# Altium PCB PCB1.PcbDoc
Units mm, origin at the board's own origin, x right, y up, seen from the top; angles counter-clockwise.
Board outline 34 x 34 mm, 2 copper layers (Top Layer, Bottom Layer); 51 components, 29 nets, 142 pads, 73 vias.
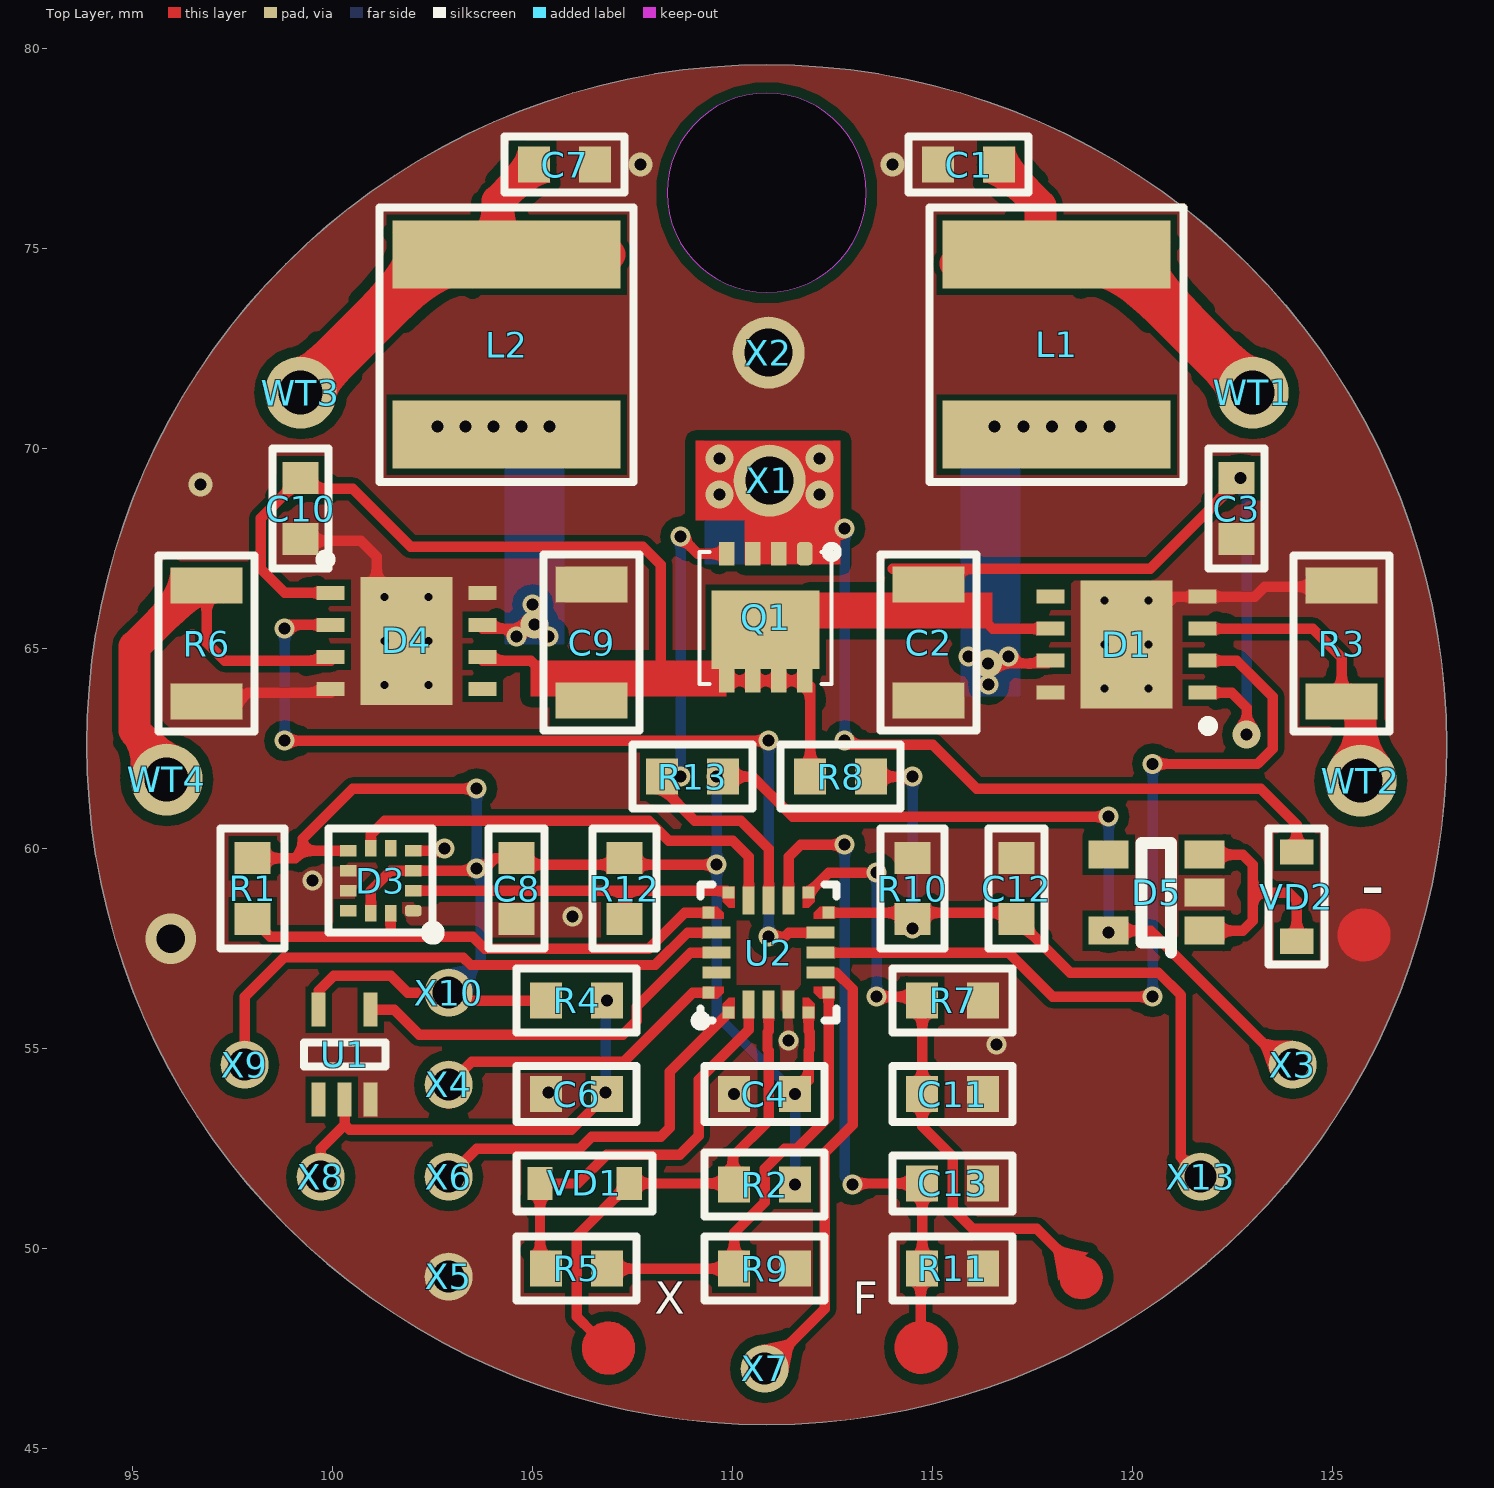
[diagram p0: Top Layer view]
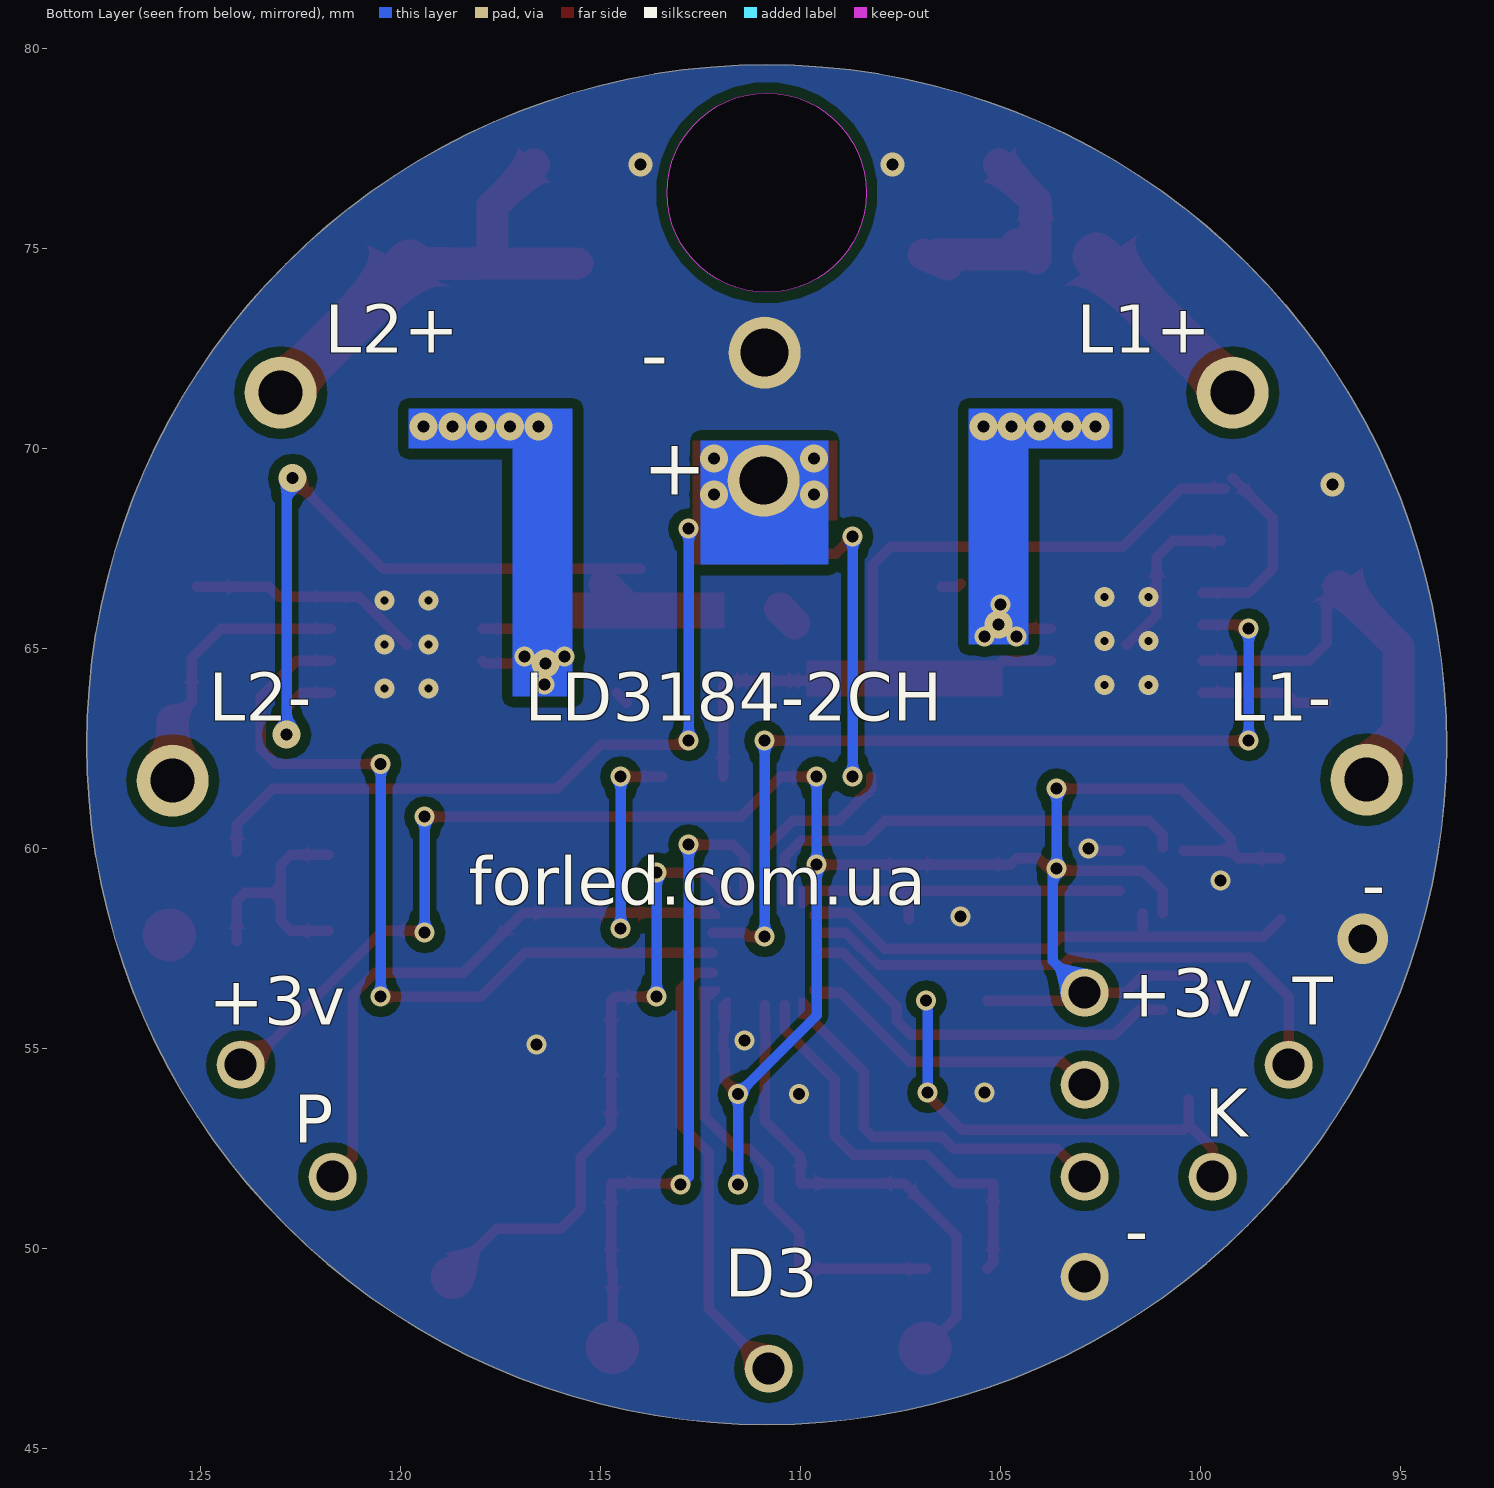
[diagram p1: Bottom Layer view, seen from below]
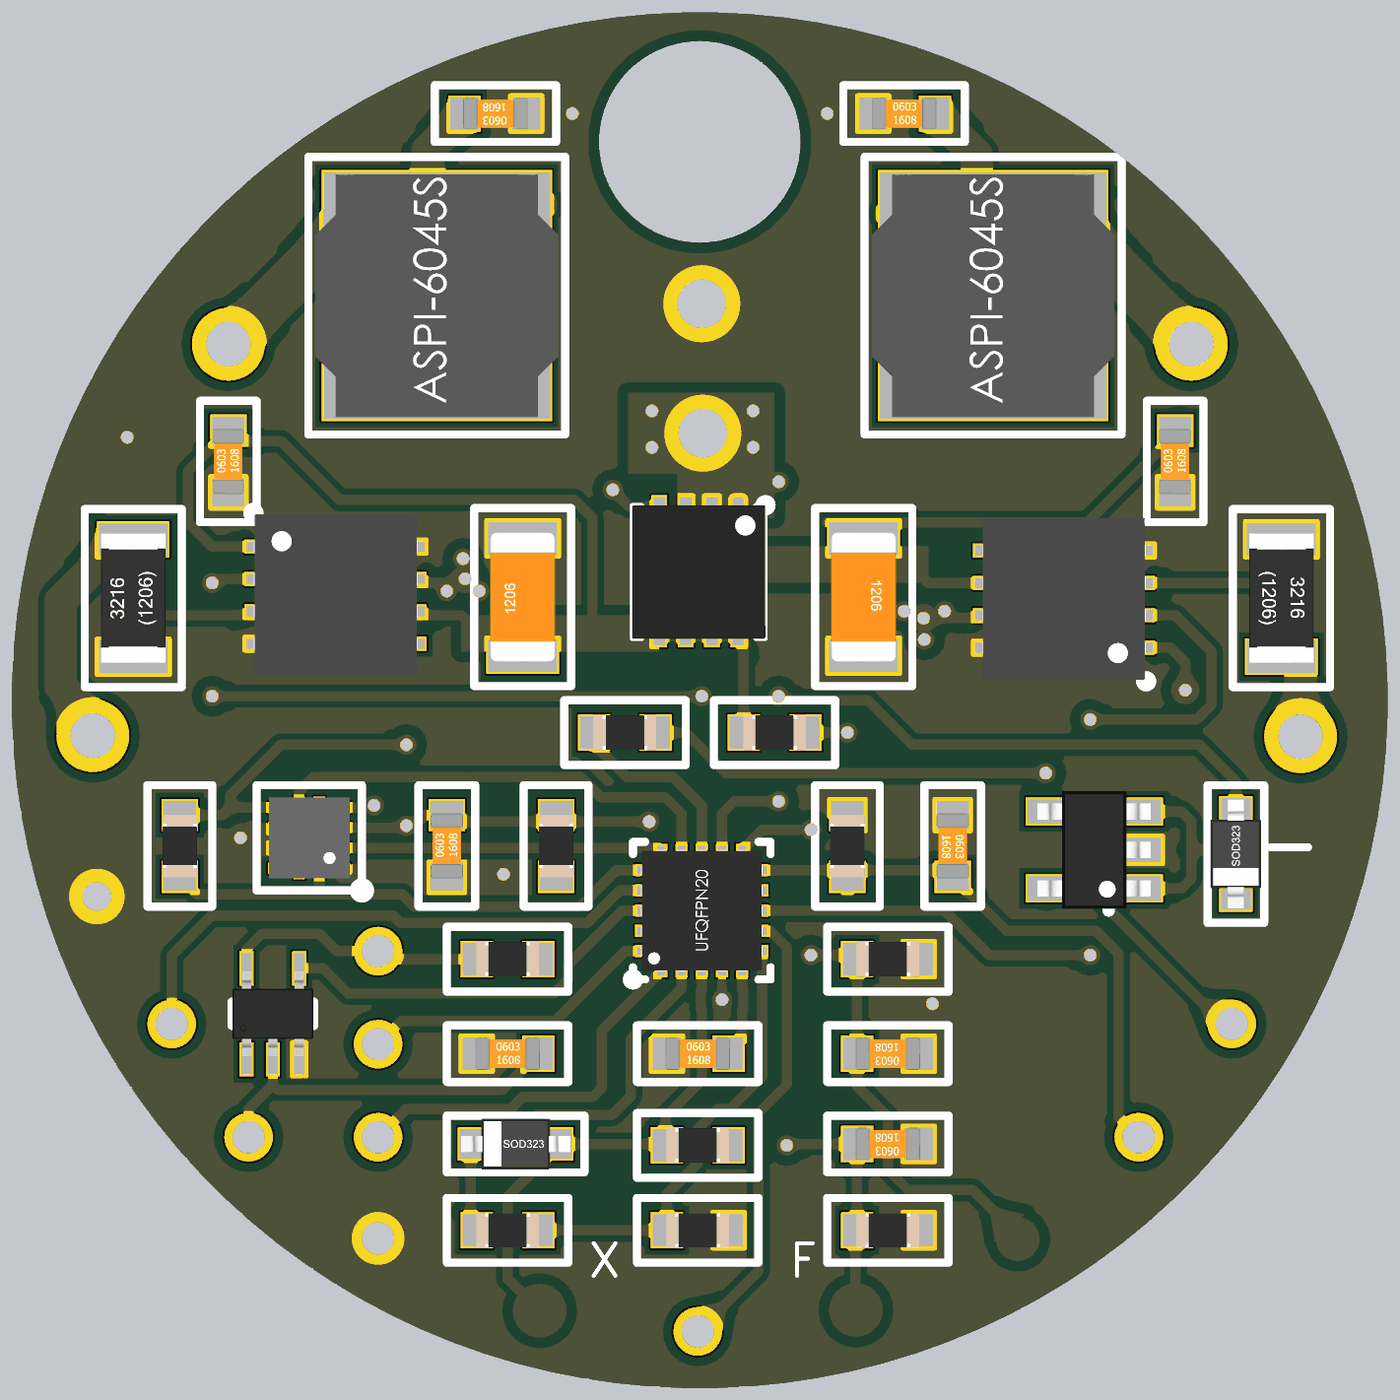
[diagram p2: 3D render of the assembled board from above, using the file's embedded part models]

## Layer stack, top to bottom
Top Solder: solder mask 0.0102, Solder Resist, Dk 3.5
Top Layer: signal copper 0.0356
Dielectric 1: dielectric 0.32, FR-4, Dk 4.8
Bottom Layer: signal copper 0.0356
Bottom Solder: solder mask 0.0102, Solder Resist, Dk 3.5

## Board outline
93.85,62.6 ccw(c110.85,62.6) 110.85,45.6 ccw(c110.85,62.6) 127.85,62.6 ccw(c110.85,62.6) 110.85,79.6 ccw(c110.85,62.6)
cut-out: 108.359,76.4 ccw(c110.85,76.4) 110.85,73.909 ccw(c110.85,76.4) 113.341,76.4 ccw(c110.85,76.4) 110.85,78.891 ccw(c110.85,76.4)

## Design rules (kind name [scope] priority, off if disabled: settings)
Clearance [All] p1: gap=0.254 except(0.01: Arc-SMDPad Track-SMDPad SMDPad-SMDPad; 0.15: Track-Track Track-THPad Track-Via Track-Fill Track-Poly Track-Region Track-Text SMDPad-THPad SMDPad-Via SMDPad-Fill SMDPad-Poly SMDPad-Region SMDPad-Text)
PasteMaskExpansion [All] p1: expansion=-0.051
PlaneConnect [All] p1: planeconnectstyle=Direct reliefexpansion=0.508 reliefentries=4 reliefconductorwidth=0.254 reliefairgap=0.254
PolygonConnect [All] p1: connectstyle=Direct reliefconductorwidth=0.254 reliefentries=4 polygonreliefangle="90 Angle" airgapwidth=0.254
RoutingVias [All] p1: holewidth=0.711 width=1.27 viastyle="Through Hole" minholewidth=0.711 minwidth=1.27 maxholewidth=0.711 maxwidth=1.27
SolderMaskExpansion [All] p1: expansion=0.051
Width [All] p1: maxlimit=1.27 minlimit=0.127 preferedwidth=0.254
28 further rules are at their usual default settings.

## Components (designator, comment, footprint, x,y, rotation, side; value= is the part's Value field where it differs from the comment)
C1 "10u" "Cap 0603" 115.9,77.1 r0 top
C2 "22u" "Cap 1206" 114.9,65.15 r270 top
C3 "1n0" "Cap 0603" 122.6,68.5 r90 top
C4 "1n0" "Cap 0603" 110.8,53.867 r0 top
C6 "10p" "Cap 0603" 106.1,53.867 r0 top
C7 "10u" "Cap 0603" 105.8,77.1 r180 top
C8 "10p" "Cap 0603" 104.6,59 r90 top
C9 "22u" "Cap 1206" 106.475,65.15 r90 top
C10 "1n0" "Cap 0603" 99.2,68.5 r90 top
C11 "1n6" "Cap 0603" 115.5,53.867 r180 top
C12 "1n6" "Cap 0603" 117.1,59 r270 top
C13 "1n6" "Cap 0603" 115.5,51.633 r180 top
D1 "LED2001" "VQFPN-8 4x4" 119.85,65.1 r90 top
D3 "BMA253" "LGA-12 2x2x0.9" 101.2,59.2 r180 top
D4 "LED2001" "VQFPN-8 4x4" 101.85,65.197 r270 top
D5 "AP2125K-3.3TRG1" SOT23-5 120.6,58.9 r270 top
L1 "51" ASPI-6045S-5R1N-T 118.1,72.6 r90 top
L2 "51" ASPI-6045S-5R1N-T 104.35,72.6 r90 top
Q1 "IRLHM620" "PQFN-8 3.3x3.3" 110.825,65.77 r180 top
R1 "103" "R0603 5%" 98,59 r270 top
R2 "103" "R0603 5%" 110.8,51.6 r0 top
R3 "PAD" "Resistor 1206" 125.225,65.125 r270 top
R4 "102" "R0603 5%" 106.1,56.2 r180 top
R5 "103" "R0603 5%" 106.1,49.5 r0 top
R6 "PAD" "Resistor 1206" 96.85,65.125 r90 top
R7 "104" "R0603 5%" 115.5,56.2 r180 top
R8 "654" "R0603 5%" 112.7,61.8 r180 top
R9 "103" "R0603 5%" 110.8,49.5 r180 top
R10 "104" "R0603 5%" 114.5,59 r270 top
R11 "104" "R0603 5%" 115.5,49.5 r180 top
R12 "203" "R0603 5%" 107.3,59 r270 top
R13 "104" "R0603 5%" 109,61.8 r0 top
U1 "SN74AUP" SC-70-5 100.3,54.85 r90 top
U2 "STM8L101" "UFQFPN20 3x3x0.5" 110.9,57.4 r90 top
VD1 "JV" SOD323 106.3,51.633 r0 top
VD2 "JV" SOD323 124.1,58.8 r90 top
WT1 "*" WT 123,71.4 r270 top
WT2 "*" WT 125.7,61.7 r270 top
WT3 "*" WT 99.2,71.4 r90 top
WT4 "*" WT 95.85,61.725 r90 top
X1 "*" "TP 0.8mm"#1 110.925,69.2 r0 top
X2 "*" "TP 0.8mm"#1 110.9,72.4 r180 top
X3 "*" "TP 0.8mm"#2 124,54.6 r180 top
X4 "*" "TP 0.8mm"#2 102.9,54.1 r180 top
X5 "*" "TP 0.8mm"#2 102.9,49.3 r180 top
X6 "*" "TP 0.8mm"#2 102.9,51.8 r180 top
X7 "*" "TP 0.8mm"#2 110.8,47 r270 top
X8 "*" "TP 0.8mm"#2 99.7,51.8 r0 top
X9 "*" "TP 0.8mm"#2 97.8,54.6 r180 top
X10 "*" "TP 0.8mm"#2 102.9,56.4 r270 top
X13 "*" "TP 0.8mm"#2 121.7,51.8 r90 top

## Footprints (in the part's own frame and the unit in brackets; to place one, negate y for a bottom-side part, rotate by r counter-clockwise, add the part's x,y. Pads: shape width x height; smd on the part's side, far side on the other; paste and mask are expansions set on the pad)
ASPI-6045S-5R1N-T [mm]
  rect 1.7x5.7 smd: 1(-2.25,0) 2(2.25,0)
  silkscreen extent -3.43,-3.17 3.43,3.18, body extent -3,-3 3,3, height 4.5
"Cap 0603" [mm]
  rect 0.8x0.9 smd: 1(-0.762,0) 2(0.762,0)
  silkscreen extent -1.5,-0.7 1.5,0.7, body extent -0.8,-0.4 0.8,0.4, height 0.8
"Cap 1206" [mm]
  rect 0.9x1.8 smd: 1(-1.45,0) 2(1.45,0)
  silkscreen extent -2.2,-1.2 2.2,1.2, body extent -1.6,-0.8 1.6,0.8, height 1
"LGA-12 2x2x0.9" [mm] "LGA-12 2x2x0.9"
  rrect50% 0.41x0.28 smd: 1(-0.815,0.75)
  rect 0.41x0.28 smd: 2(-0.815,0.25) 3(-0.815,-0.25) 4(-0.815,-0.75) 7(0.815,-0.75) 8(0.815,-0.25) 9(0.815,0.25) 10(0.815,0.75)
  rect 0.28x0.41 smd: 5(-0.25,-0.815) 6(0.25,-0.815) 11(0.25,0.815) 12(-0.25,0.815)
  silkscreen extent -1.45,-1.3 1.3,1.45, body extent -1,-1 1,1, height 0.95
"PQFN-8 3.3x3.3" [mm]
  rrect50% 0.39x0.58 smd: 1(-0.975,-1.605)
  rect 0.39x0.58 smd: 2(-0.325,-1.605) 3(0.325,-1.605) 4(0.975,-1.605) 5(-0.975,1.57) 5(-0.325,1.57) 5(0.325,1.57) 5(0.975,1.57)
  rect 2.7x1.96 smd paste-2: 5(0,0.3)
  silkscreen extent -1.8,-1.8 1.65,1.65, body extent -1.65,-1.65 1.65,1.65, height 0.76
"R0603 5%" [mm]
  rect 0.8x0.9 smd: 1(-0.762,0) 2(0.762,0)
  silkscreen extent -1.5,-0.8 1.5,0.8, body extent -0.77,-0.43 0.78,0.43, height 0.43
"Resistor 1206" [mm]
  rect 0.9x1.8 smd: 1(-1.45,0) 2(1.45,0)
  silkscreen extent -2.2,-1.2 2.2,1.2, body extent -1.6,-0.8 1.6,0.8, height 0.55
SC-70-5 [mm]
  rect 0.85x0.35 smd: 1(-1.125,0.65) 2(-1.125,0) 3(-1.125,-0.65) 4(1.125,-0.65) 5(1.125,0.65)
  silkscreen extent -0.3,-1.02 0.3,1.02, body extent -1.05,-1 1.05,1, height 0.95
SOD323 [mm]
  rect 0.63x0.83 smd: 1(-1.115,0) 2(1.115,0)
  silkscreen extent -1.7,-0.7 1.7,0.7, body extent -1.35,-0.62 1.35,0.63, height 1.1
SOT23-5 [mm]
  rect 0.7x1 smd: 1(0.95,1.2) 2(0,1.2) 3(-0.95,1.2) 4(-0.95,-1.2) 5(0.95,-1.2)
  silkscreen extent -1.24,-0.38 1.5,0.36, body extent -1.45,-1.4 1.45,1.4, height 1.45
"TP 0.8mm"#1 [mm]
  round 1.8 hole 1.2: 1(0,0)
"TP 0.8mm"#2 [mm]
  round 1.2 hole 0.8: 1(0,0)
"UFQFPN20 3x3x0.5" [mm]
  rect 0.3x0.3 smd paste-0.3 mask-0.3: 1(-1.5,1) 5(-1.5,-1) 6(-1,-1.5) 10(1,-1.5) 11(1.5,-1) 15(1.5,1) 16(1,1.5) 20(-1,1.5)
  rect 0.7x0.3 smd: 2(-1.3,0.5) 3(-1.3,0) 4(-1.3,-0.5) 12(1.3,-0.5) 13(1.3,0) 14(1.3,0.5)
  rect 0.3x0.7 smd: 7(-0.5,-1.3) 8(0,-1.3) 9(0.5,-1.3) 17(0.5,1.3) 18(0,1.3) 19(-0.5,1.3)
  Top Layer region: -1.15,1.65 -0.85,1.65 -0.85,1.125 -1,1.125 -1.15,1.275
  Top Layer region: -1.65,1.15 -1.65,0.85 -1.125,0.85 -1.125,1 -1.275,1.15
  Top Layer region: -1.15,-1.65 -0.85,-1.65 -0.85,-1.125 -1,-1.125 -1.15,-1.275
  Top Layer region: -1.65,-1.15 -1.65,-0.85 -1.125,-0.85 -1.125,-1 -1.275,-1.15
  Top Layer region: 1.65,-1.15 1.65,-0.85 1.125,-0.85 1.125,-1 1.275,-1.15
  Top Layer region: 1.15,-1.65 0.85,-1.65 0.85,-1.125 1,-1.125 1.15,-1.275
  Top Layer region: 1.15,1.65 0.85,1.65 0.85,1.125 1,1.125 1.15,1.275
  Top Layer region: 1.65,1.15 1.65,0.85 1.125,0.85 1.125,1 1.275,1.15
  silkscreen extent -1.82,-1.7 1.7,1.82, body extent -1.5,-1.5 1.5,1.5, height 0.55
"VQFPN-8 4x4" [mm]
  rect 0.35x0.7 smd: 1(-1.2,-1.9) 2(-0.4,-1.9) 3(0.4,-1.9) 4(1.2,-1.9) 5(1.2,1.9) 6(0.4,1.9) 7(-0.4,1.9) 8(-1.2,1.9)
  rect 3.2x2.3 smd: 9(0,0)
  silkscreen extent -2.16,-2.16 -1.91,-1.91, body extent -2,-2.02 2,2.02, height 0.9
WT [mm]
  round 1.8 hole 1.1: 1(0,0)

## Part data
C1 C7: library part CMP-00038-7, "NO"
C2 C9: library part CMP-00564-4, "NO"
C3 C4 C10: library part CMP-00074-6, "1n x 50V"
C6 C8: library part CMP-00036-6, "10p x 25V"
C11 C12 C13: library part CMP-00078-6, "1n6 x 50V"
D1 D4: library part CMP-00546-6
D3: library part CMP-00712-2
D5: library part CMP-00704-3
L1 L2: library part CMP-00554-3, "ASPI-6045S-5R1N-T, 5.1uH x 3.3A"
Q1: library part CMP-00792-2, "IRLHM620PbF"
R1 R2 R5 R9: library part CMP-00052-5, "R 10K"
R3 R6: library part CMP-00516-5
R4: library part CMP-00040-5, "R 1K0"
R7 R10 R11 R13: library part CMP-00156-5, "R M10"
R8: library part CMP-00565-4, "R M65"
R12: library part CMP-00056-5, "R 20K"
U1: library part SN74AUP1G17DCKR, "SN74AUP1G17DCKR"
U2: library part CMP-03099-1, "STM8L101F3U6TR"
VD1 VD2: library part CMP-00083-4, "BAT54HT1G"
WT1 WT2 WT3 WT4: library part CMP-00159-3, "WT"
X1 X2 X3 X4 X5 X6 X7 X8 X9 X10 X13: library part CMP-00326-5, "TP 0.8mm"

## Via types
v1: diameter 0.5, hole 0.3, Top Layer to Bottom Layer, tented both sides, 39 vias
v2: diameter 0.7, hole 0.3, Top Layer to Bottom Layer, tented both sides, 18 vias
v3: diameter 0.5, hole 0.2, Top Layer to Bottom Layer, 12 vias
v4: diameter 0.6, hole 0.3, Top Layer to Bottom Layer, tented both sides, 3 vias
v5: diameter 1.27, hole 0.711, Top Layer to Bottom Layer, 1 vias

## Nets (pads, with @x,y where several pads share a name; then routed paths per layer and width w, separated by ;. In a path a pad name is that pad's centre, name@x,y a point inside that pad or via, vN(x,y) a via of type N, cw(c..) or ccw(c..) an arc to the next point about the centre after c; other vN are vias at no path point)
20V_IN: Q1.1 Q1.2 Q1.3 VD2.2 X1.1 | length 20.5
  Top Layer w0.254: 110.9,67.475 110.8,67.375 Q1.2 Q1.1 112.175,67.375 v1(112.8,68) ; v1@112.8,62.8 113,62.6 115,62.6 116.1,61.5 123.2,61.5 124.1,60.6 VD2.2
  Bottom Layer w0.254: v1@112.8,62.8 v1(112.8,68)
  other v1: 112.8,62.7
  other v2: 109.669,68.85 112.169,68.85 109.669,69.75 112.169,69.75
+3: C4.2 C8.2 D3.3 D3.7 D3.11 D5.5 R1.1 R2.2 R4.2 R12.1 R13.2 U1.5 U2.5 X3.1 X10.1 | length 61.3
  Top Layer w0.254: R1.1 99.062,59.762 99.25,59.95 ; U1.5 99.65,56.45 100.025,56.825 101.45,56.825 101.875,56.4 X10.1 103.1,56.2 R4.2 ; D3.7@100.424,59.95 D3.7 99.25,59.95 ; D3.11 100.95,58.95 101.2,59.2 ; 101.174,59.2 101.2,59.2 ; v1(103.6,61.5) 100.5,61.5 99.25,60.25 99.25,59.95 ; v1(109.6,59.6) 104.762,59.6 C8.2 104.062,59.762 103.75,59.45 D3.3 101.45,59.45 101.2,59.2 ; R13.2 110.5,61.8 111.5,60.8 v1(119.4,60.8) ; v1(111.562,53.867) 111.9,54.205 111.9,54.955 111.927,54.982 111.927,55.418 111.9,55.445 U2.5 ; D5.5 120.45,57.95 X3.1@123.8,54.6
  Bottom Layer w0.254: X10.1 103.7,57.2 v1@103.7,59.5 ; v1(103.6,59.5) v1(103.6,61.5) ; v1(109.6,61.8) v1(109.6,59.6) 109.6,55.829 v1(111.562,53.867) v1(111.562,51.6) ; v1(119.4,57.9) v1(119.4,60.8)
ADC_ON: R5.1 U2.2 VD1.1 | length 10.4
  Top Layer w0.254: R5.1 105.185,49.653 VD1.1 106.133,51.633 106.85,52.35 108.675,52.35 109.15,52.825 109.15,54.225 110.4,55.475 U2.2
ADC_SET: R5.2 R9.2 U2.6 | length 11.2
  Top Layer w0.254: R5.2 R9.2 110.038,50.4 110.8,51.162 110.8,52 111.3,52.5 111.6,52.5 112.4,53.3 U2.6
AXEL_INT: D3.6 U2.14 | length 11.4
  Top Layer w0.254: D3.6 100.95,60.35 101.3,60.7 107.9,60.7 108.4,60.2 110,60.2 110.4,59.8 U2.14
BAT_MEASURE: C12.2 R8.1 R10.2 U2.10 X13.1 | length 19.2
  Top Layer w0.254: U2.10 116.938,58.4 C12.2 118.438,56.9 120.645,56.9 121.2,56.345 121.2,52.3 X13.1 ; R8.1 v1(114.5,61.8)
  Bottom Layer w0.254: v1(114.5,58) v1(114.5,61.8)
BTN_protect: U1.4 U2.18 | length 10
  Top Layer w0.254: U1.4 101.539,55.975 102.164,55.35 107.25,55.35 107.6,55.7 107.6,56.057 108.943,57.4 U2.18
D3: U2.7 X7.1 | length 11.4
  Top Layer w0.254: X7.1 112.3,48.5 112.3,52.4 113,53.1 113,56.492 112.592,56.9 U2.7
DIM_1: D1.2 U2.8 | length 21.3
  Top Layer w0.254: U2.8 116.9,57.4 118,56.3 v1(120.5,56.3) ; v1@120.4,62.122 v1(120.5,62.122) 123.122,62.122 123.5,62.5 123.5,63.8 122.6,64.7 D1.2
  Bottom Layer w0.254: v1(120.5,56.3) v1(120.5,62.122)
DIM_2: D4.2 U2.9 | length 22.2
  Top Layer w0.254: v1(98.8,62.7) v1(110.9,62.7) ; v1(98.8,65.5) 98.897,65.597 D4.2 ; v1(110.9,57.8) 111.3,57.8 111.4,57.9 U2.9
  Bottom Layer w0.254: v1(98.8,62.7) v1(98.8,65.5) ; v1@110.9,57.9 v1(110.9,62.7)
DQ: U2.17 X9.1 | length 14.3
  Top Layer w0.254: X9.1 97.8,56.3 98.777,57.277 103.263,57.277 103.444,57.096 108.067,57.096 108.871,57.9 U2.17
DRIVERS_POWON: Q1.4 R13.1 U2.13 | length 12.2
  Top Layer w0.254: R13.1 108.238,61.512 109.05,60.7 110.2,60.7 110.9,60 U2.13 ; v1(108.7,67.8) 109.125,67.375 Q1.4
  Bottom Layer w0.254: v1(108.7,61.8) v1(108.7,67.8)
DRIVERS_VCC: C2.1 C3.2 C9.1 C10.2 D1.1 D1.6 D4.1 D4.6 Q1.5 R8.2 | length 43.8
  Top Layer w0.254: C10.2 98.2,68.262 98.2,67 98.803,66.397 D4.1 ; C10.2@99.4,69 100.5,69 101.95,67.55 107.75,67.55 108.2,67.1 108.2,64.6 ; D4.6@103.75,64.7 104.95,64.7 105.075,64.575 ; Q1.5@109.85,64.2 110.5,64.2 111.15,64.2 111.8,64.2 111.938,64.062 R8.2 ; C2.1@114,67 120.438,67 v2(122.7,69.262) ; 116.25,65.75 116.5,65.5 D1.6 ; D1.1 122.475,63.9 122.85,63.525 v2(122.85,62.85)
  Top Layer w0.8: Q1.5@110.15,65.63 110.408,65.887 Q1.5@110.52,66 ; 114.3,66 C2.1
  Bottom Layer w0.254: v2(122.7,69.262) 122.85,69.112 v2(122.85,62.85)
LED1: C1.2 L1.2 WT1.1 | length 12.1
  Top Layer w0.8: L1.2@115.575,74.625 L1.2@117.7,74.625 ; C1.2 117.7,76.062 L1.2@117.7,74.708 ; L1.2@117.65,74.715 L1.2@117.7,74.708 ; L1.2@118.1,74.65 118.072,74.654 L1.2@117.7,74.708 ; L1.2@119.775,74.625 L1.2@117.7,74.625 ; L1.2@117.7,74.625 L1.2@117.7,74.708
  Top Layer w1.2: L1.2@119.775,74.625 WT1.1
LED2: C7.2 L2.2 WT3.1 | length 11.1
  Top Layer w0.8: L2.2@104.125,74.75 L2.2@104.125,74.85 ; L2.2@104.6,75.1 L2.2 ; C7.2 104.125,76.187 L2.2@104.125,74.85 ; L2.2@106.925,74.85 106.325,74.6 106.575,74.85 L2.2 ; L2.2@104.125,74.85 L2.2
  Top Layer w1.2: WT3.1@99.375,71.575 L2.2@102.6,74.8
NetC6_2: C6.2 R4.1 U1.2 X8.1 | length 11.5
  Top Layer w0.254: X8.1 99.7,52.5 100.3,53.1 ; U1.2 100.3,53.1 ; C6.2 105.97,52.975 100.425,52.975 100.3,53.1
  Bottom Layer w0.254: v1(106.825,53.9) 106.825,56.163 v1(106.862,56.2)
NetD1_3: D1.3 R3.2 WT2.1 | length 6.8
  Top Layer w0.254: D1.3 124.5,65.5 125.225,64.775 R3.2 125.7,63.2
  Top Layer w0.8: WT2.1@125.7,61.95 125.7,63.2
NetD1_7: D1.7 L1.1 | length 1.6
  Top Layer w0.254: v2(116.381,64.628) 117.878,64.628 D1.7
  other v1: 116.4,64.1 115.9,64.8 116.9,64.8
  other v2: 116.55,70.55 117.269,70.55 117.987,70.55 118.706,70.55 119.425,70.55
NetD4_3: D4.3 R6.2 WT4.1 | length 10.4
  Top Layer w0.254: R6.2@96.55,66.55 R6.2@96.85,66.55 ; R6.2@96.85,66.15 96.85,65.15 97.3,64.7 D4.3@99.95,64.7
  Top Layer w0.8: WT4.1 95.85,62.15 95.05,62.95 95.05,65.05 R6.2@96.55,66.55
NetD4_7: D4.7 L2.1 | length 1.5
  Top Layer w0.254: D4.7@103.75,65.5 v2@105.25,65.5
  other v1: 104.6,65.3 105.4,65.3 105,66.1
  other v2: 105.05,65.6 102.625,70.55 103.325,70.55 104.025,70.55 104.725,70.55 105.425,70.55
NetD5_1: D5.1 D5.3 VD2.1 | length 6.2
  Top Layer w0.254: D5.1 122.75,57.95 123,58.2 123,58.9 ; D5.3 122.75,59.85 123,59.6 123,58.9 ; VD2.1 124.1,58.7 123.9,58.9 123,58.9
P_GND: C1.1 C2.2 C3.1 C4.1 C6.1 C7.1 C8.1 C9.2 C10.1 C11.1 C12.1 C13.1 D1.4 D1.8 D1.9 D3.1 D3.4 D3.8 D3.9 D4.4 D4.8 D4.9 D5.2 R3.1 R6.1 R7.1 R9.1 R10.1 R11.1 U1.3 U2.4 X2.1 X5.1 | length 18.4
  Top Layer w0.254: R6.1@96.85,63.65 97.625,63.65 97.875,63.9 D4.4@99.95,63.9 ; C10.1@99.5,67.7 100.7,67.7 101.1,67.3 101.1,65.85 D4.9@101.85,65.1 ; D3.4 102.75,59.95 v1(102.8,60) ; C9.2@106,66.627 106.077,66.55 C9.2@106.475,66.55 ; C2.2@114.35,63.65 C2.2@114.6,63.9 ; D1.9 121.05,66.3 D1.4@121.8,66.3 ; D1.4 123.05,66.3 123.3,66.55 R3.1@125.1,66.55 ; 125.404,58.225 cw(c125.785,57.844) 126.324,57.844 cw(c125.785,57.844) 125.404,58.225
  other v1: 110.038,53.867 105.4,53.9 116.6,55.1 111.4,55.2 106,58.3 99.5,59.2
  other v3: 119.3,64 120.4,64 101.3,64.097 102.4,64.097 119.3,65.1 120.4,65.1 101.3,65.197 102.4,65.197 119.3,66.2 120.4,66.2 101.3,66.297 102.4,66.297
  other v4: 96.7,69.1 107.7,77.1 114,77.1
  other v5: 95.95,57.75
PhotoTrans: C11.2 R7.2 U2.11 | length 15.4
  Top Layer w0.254: U2.11 112.4,59.4 113.3,59.4 ; v1(113.6,56.3) 114.638,56.3 R7.2 C11.2 114.738,53.062 115.5,52.3 115.5,51 116,50.5 117.6,50.5 118.8,49.3
  Bottom Layer w0.254: v1(113.6,56.3) v1(113.6,59.4)
Reset: U2.1 X6.1 | length 9.5
  Top Layer w0.254: X6.1 103.6,52.5 106.175,52.5 106.475,52.8 108.2,52.8 108.425,53.025 108.425,54.425 U2.1
SCL: D3.12 R1.2 U2.16 | length 12.5
  Top Layer w0.254: R1.2 98.438,57.8 103.5,57.8 103.8,57.5 107.9,57.5 108.8,58.4 U2.16 ; 101.45,57.95 D3.12
SDA: D3.2 R12.2 U2.15 | length 8.6
  Top Layer w0.254: D3.2 107.3,58.95 ; R12.2 107.3,58.95 ; U2.15 109.85,58.95 107.3,58.95
SWIM: U2.20 X4.1 | length 7.9
  Top Layer w0.254: X4.1@102.9,53.625 X4.1 103.475,54.675 107.275,54.675 109,56.4 U2.20
TermoResistor: C13.2 R11.2 U2.12 | length 20.5
  Top Layer w0.254: U2.12 111.4,59.8 111.7,60.1 v1(112.8,60.1) ; v1(113,51.6) 113.033,51.633 C13.2 R11.2 114.7,49.462 114.7,48.07 ; 114.7,47.5 114.7,48.07 ; 114.7,48.07 cw(c114.71,47.531) 115.248,47.531 cw(c114.71,47.531) 114.329,47.912 cw(c114.71,47.531) 114.7,48.07
  Bottom Layer w0.254: v1(112.8,60.1) 112.8,51.8 v1(113,51.6)
UART: R2.1 U2.3 VD1.2 | length 15.8
  Top Layer w0.254: 106.9,47.5 106.509,47.891 ; U2.3 110.9,55.445 110.873,55.418 110.873,54.982 110.9,54.955 110.9,53.2 110.005,52.305 110.005,51.633 VD1.2 106.1,50.318 106.1,48.3 106.509,47.891 ; 106.509,47.891 ccw(c106.893,47.514) 107.432,47.514 ccw(c106.893,47.514) 106.513,47.895 ccw(c106.893,47.514) 106.509,47.891
pads on no net: D1.5 D3.5 D3.10 D4.5 D5.4 U1.1 U2.19

## Polygon pours and split planes (outlines as drawn)
P_GND on Bottom Layer "P_GND_L02_P000" (solid, remove dead copper, pour order 0): 93.85,62.6 ccw(c110.85,62.6) 110.85,45.6 ccw(c110.85,62.6) 127.85,62.6 ccw(c110.85,62.6) 110.85,79.6 ccw(c110.85,62.6)
P_GND on Top Layer "P_GND_L01_P002" (solid, remove dead copper, pour order 2): 93.85,62.6 ccw(c110.85,62.6) 110.85,45.6 ccw(c110.85,62.6) 127.85,62.6 ccw(c110.85,62.6) 110.85,79.6 ccw(c110.85,62.6)

## Other copper
Top Layer:
  region net 20V_IN: 112.7,70.2 109.075,70.2 109.075,68.2 112.7,68.2
  region net 20V_IN: 112.7,68.5 110.3,68.5 110.3,67.1 112.7,67.1
  rectangle net DRIVERS_VCC: 111.9,65.5 116.5,66.4
  rectangle net DRIVERS_VCC: 104.95,63.8 109.85,64.7
  region net P_GND: 125.404,58.225 ccw(c125.785,57.844) 126.324,57.844 ccw(c125.785,57.844)
  region net UART: 106.513,47.895 ccw(c106.893,47.514) 107.432,47.514 ccw(c106.893,47.514)
  region net TermoResistor: 114.329,47.912 ccw(c114.71,47.531) 115.248,47.531 ccw(c114.71,47.531)
  region net PhotoTrans: 118.329,49.662 ccw(c118.71,49.281) 119.248,49.281 ccw(c118.71,49.281)
Bottom Layer:
  rectangle net NetD1_7: 116.2,70 119.8,71
  rectangle net NetD1_7: 115.7,63.8 117.2,71
  rectangle net NetD4_7: 102.2,70 105.8,71
  rectangle net NetD4_7: 104.3,65.1 105.8,71
  region net 20V_IN: 112.5,70.2 109.3,70.2 109.3,67.1 112.5,67.1

## Silkscreen, mask and mechanical layers (free items; w line width, h text height)
Top Overlay:
  text "-" at 126.3,58.5 h1.2
  text "X" at 108.05,48.375 h0.8
  text "F" at 113,48.375 h0.8
Bottom Overlay:
  text "L1+" at 103.1,72.4 h1.2
  text "L2+" at 121.9,72.4 h1.2
  text "-" at 114,71.675 h1.4
  text "+" at 113.95,68.85 h1.4
  text "L1-" at 99.3,63.2 h1.2
  text "LD3184-2CH" at 116.9,63.2 h1.2
  text "L2-" at 124.8,63.2 h1.2
  text "forled.com.ua" at 118.3,58.6 h1.2
  text "-" at 95.975,58.5 h1.2
  text "+3v" at 102.1,55.8 h1.2
  text "T" at 97.7,55.6 h1.2
  text "+3v" at 124.8,55.6 h1.2
  text "K" at 99.9,52.8 h1.2
  text "P" at 122.675,52.65 h1.2
  text "-" at 101.9,49.85 h1.2
  text "D3" at 111.9,48.8 h1.2
Board:
  circle w0.1: c110.825,62.55 r17
  circle w0.254: c110.85,76.4 r2.491